# Altium PCB PAY_IFB_VER1.PcbDoc (part 1 of 4)
Units mil, origin at the board's own origin, x right, y up, seen from the top; angles counter-clockwise.
Board outline 6000 x 4000 mil, 2 copper layers (Top Layer, Bottom Layer); 413 components, 311 nets, 2101 pads, 9 vias.
Unrouted connection lines stored in the file: 1231.
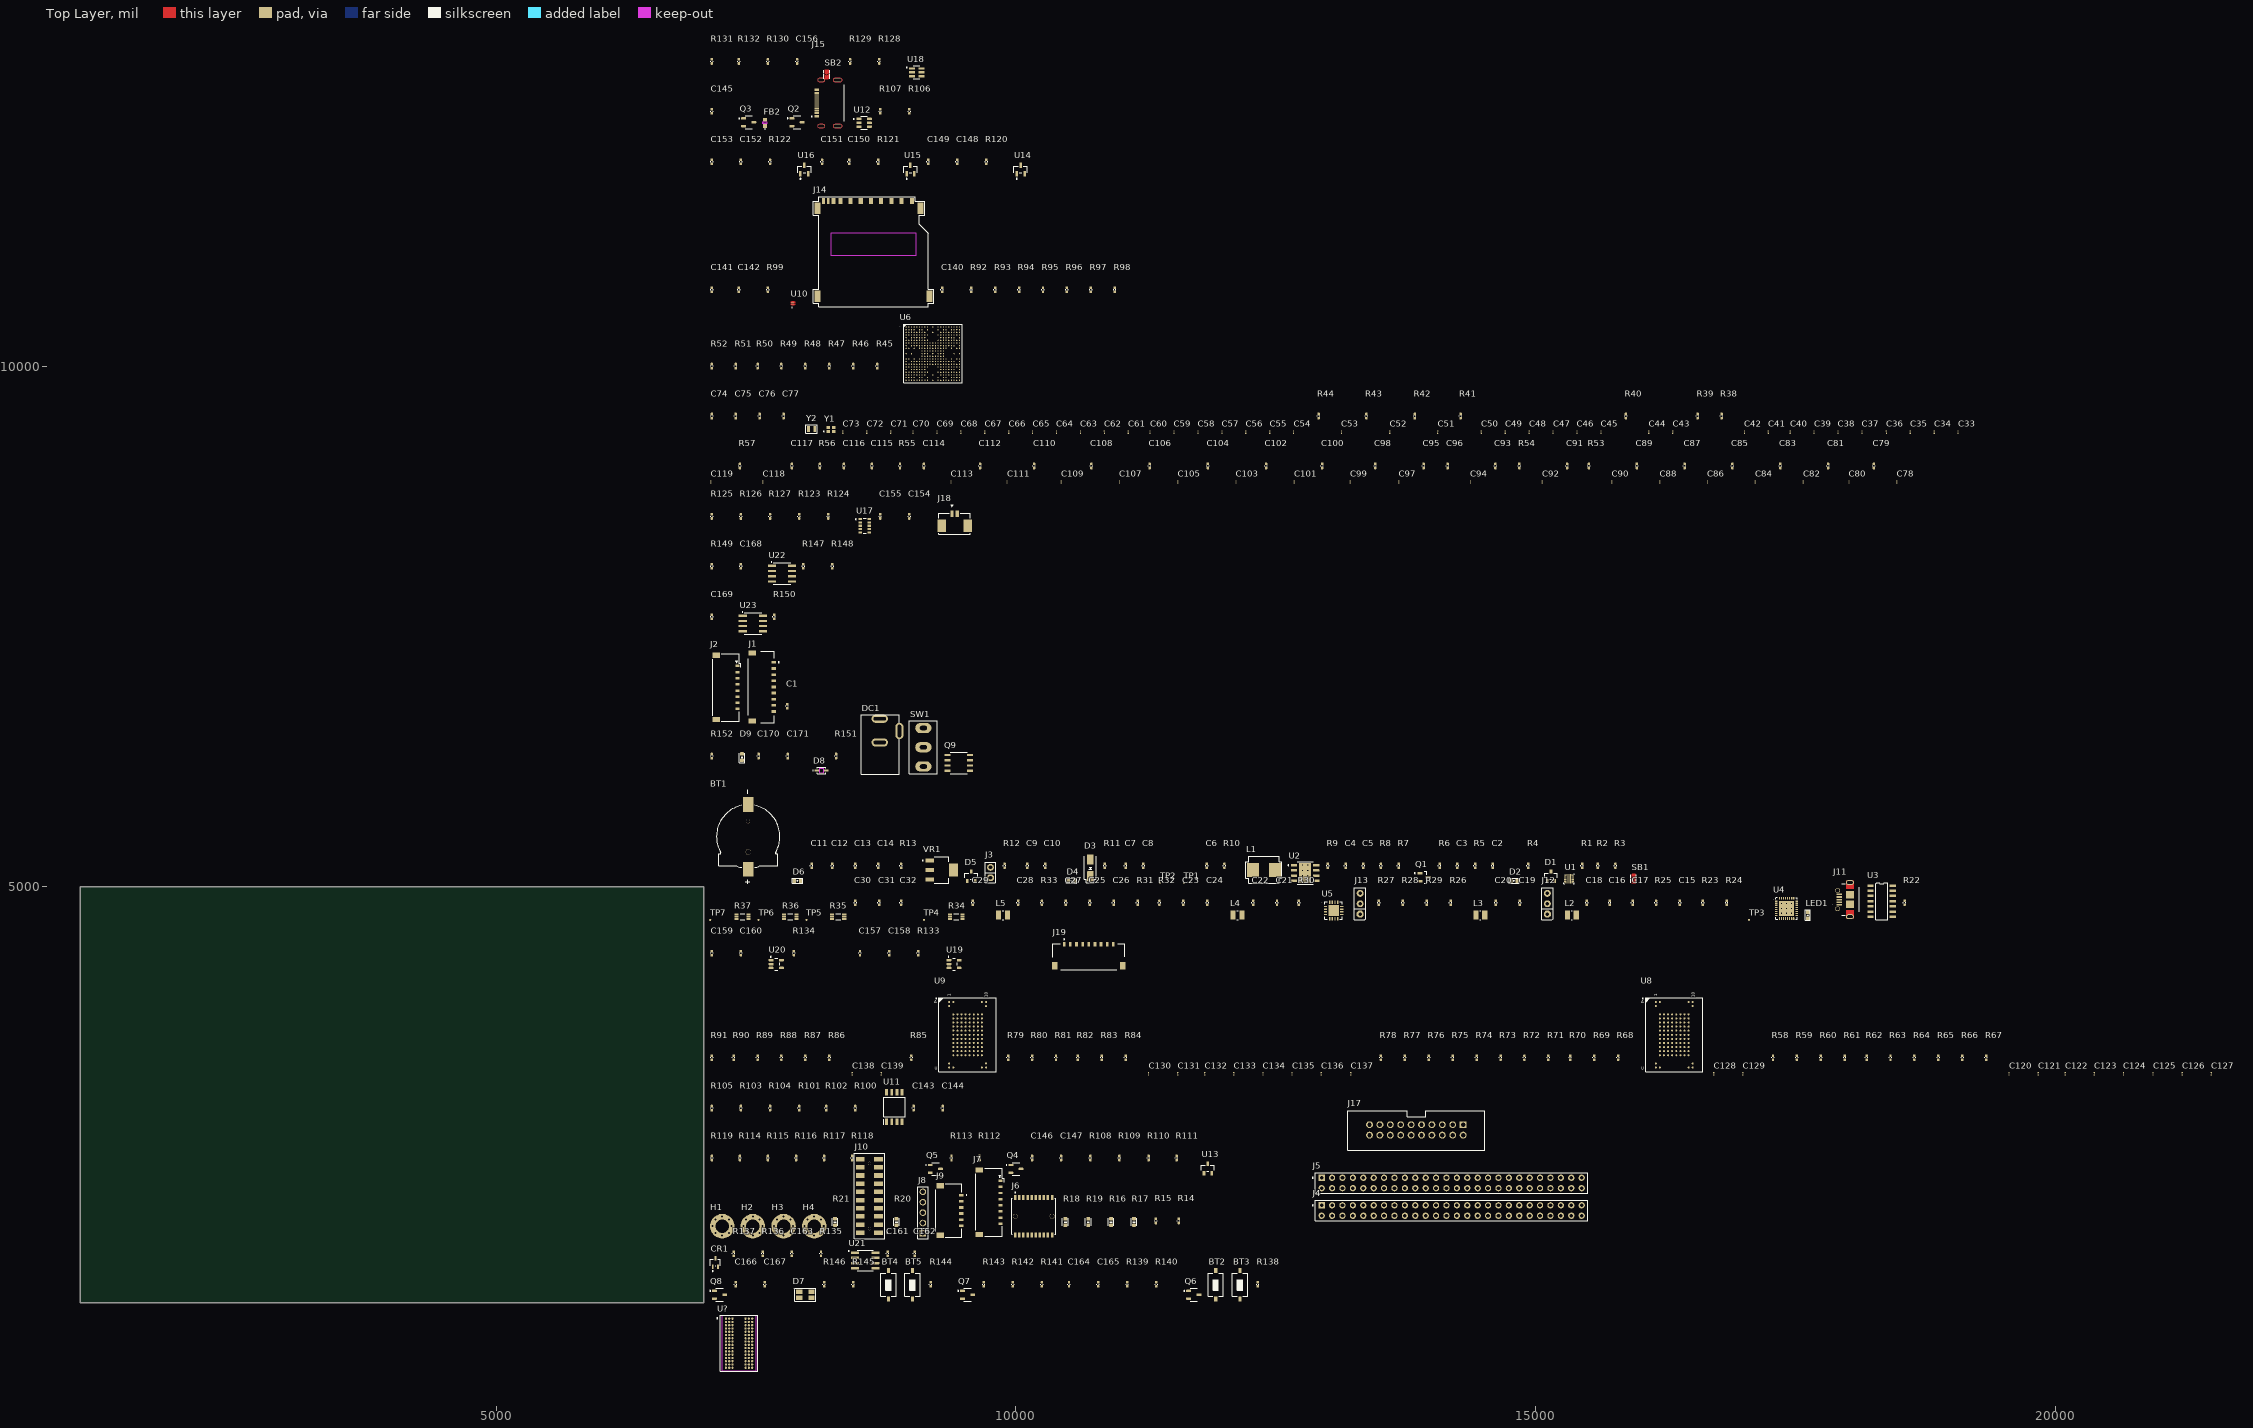
[diagram p0: Top Layer view]
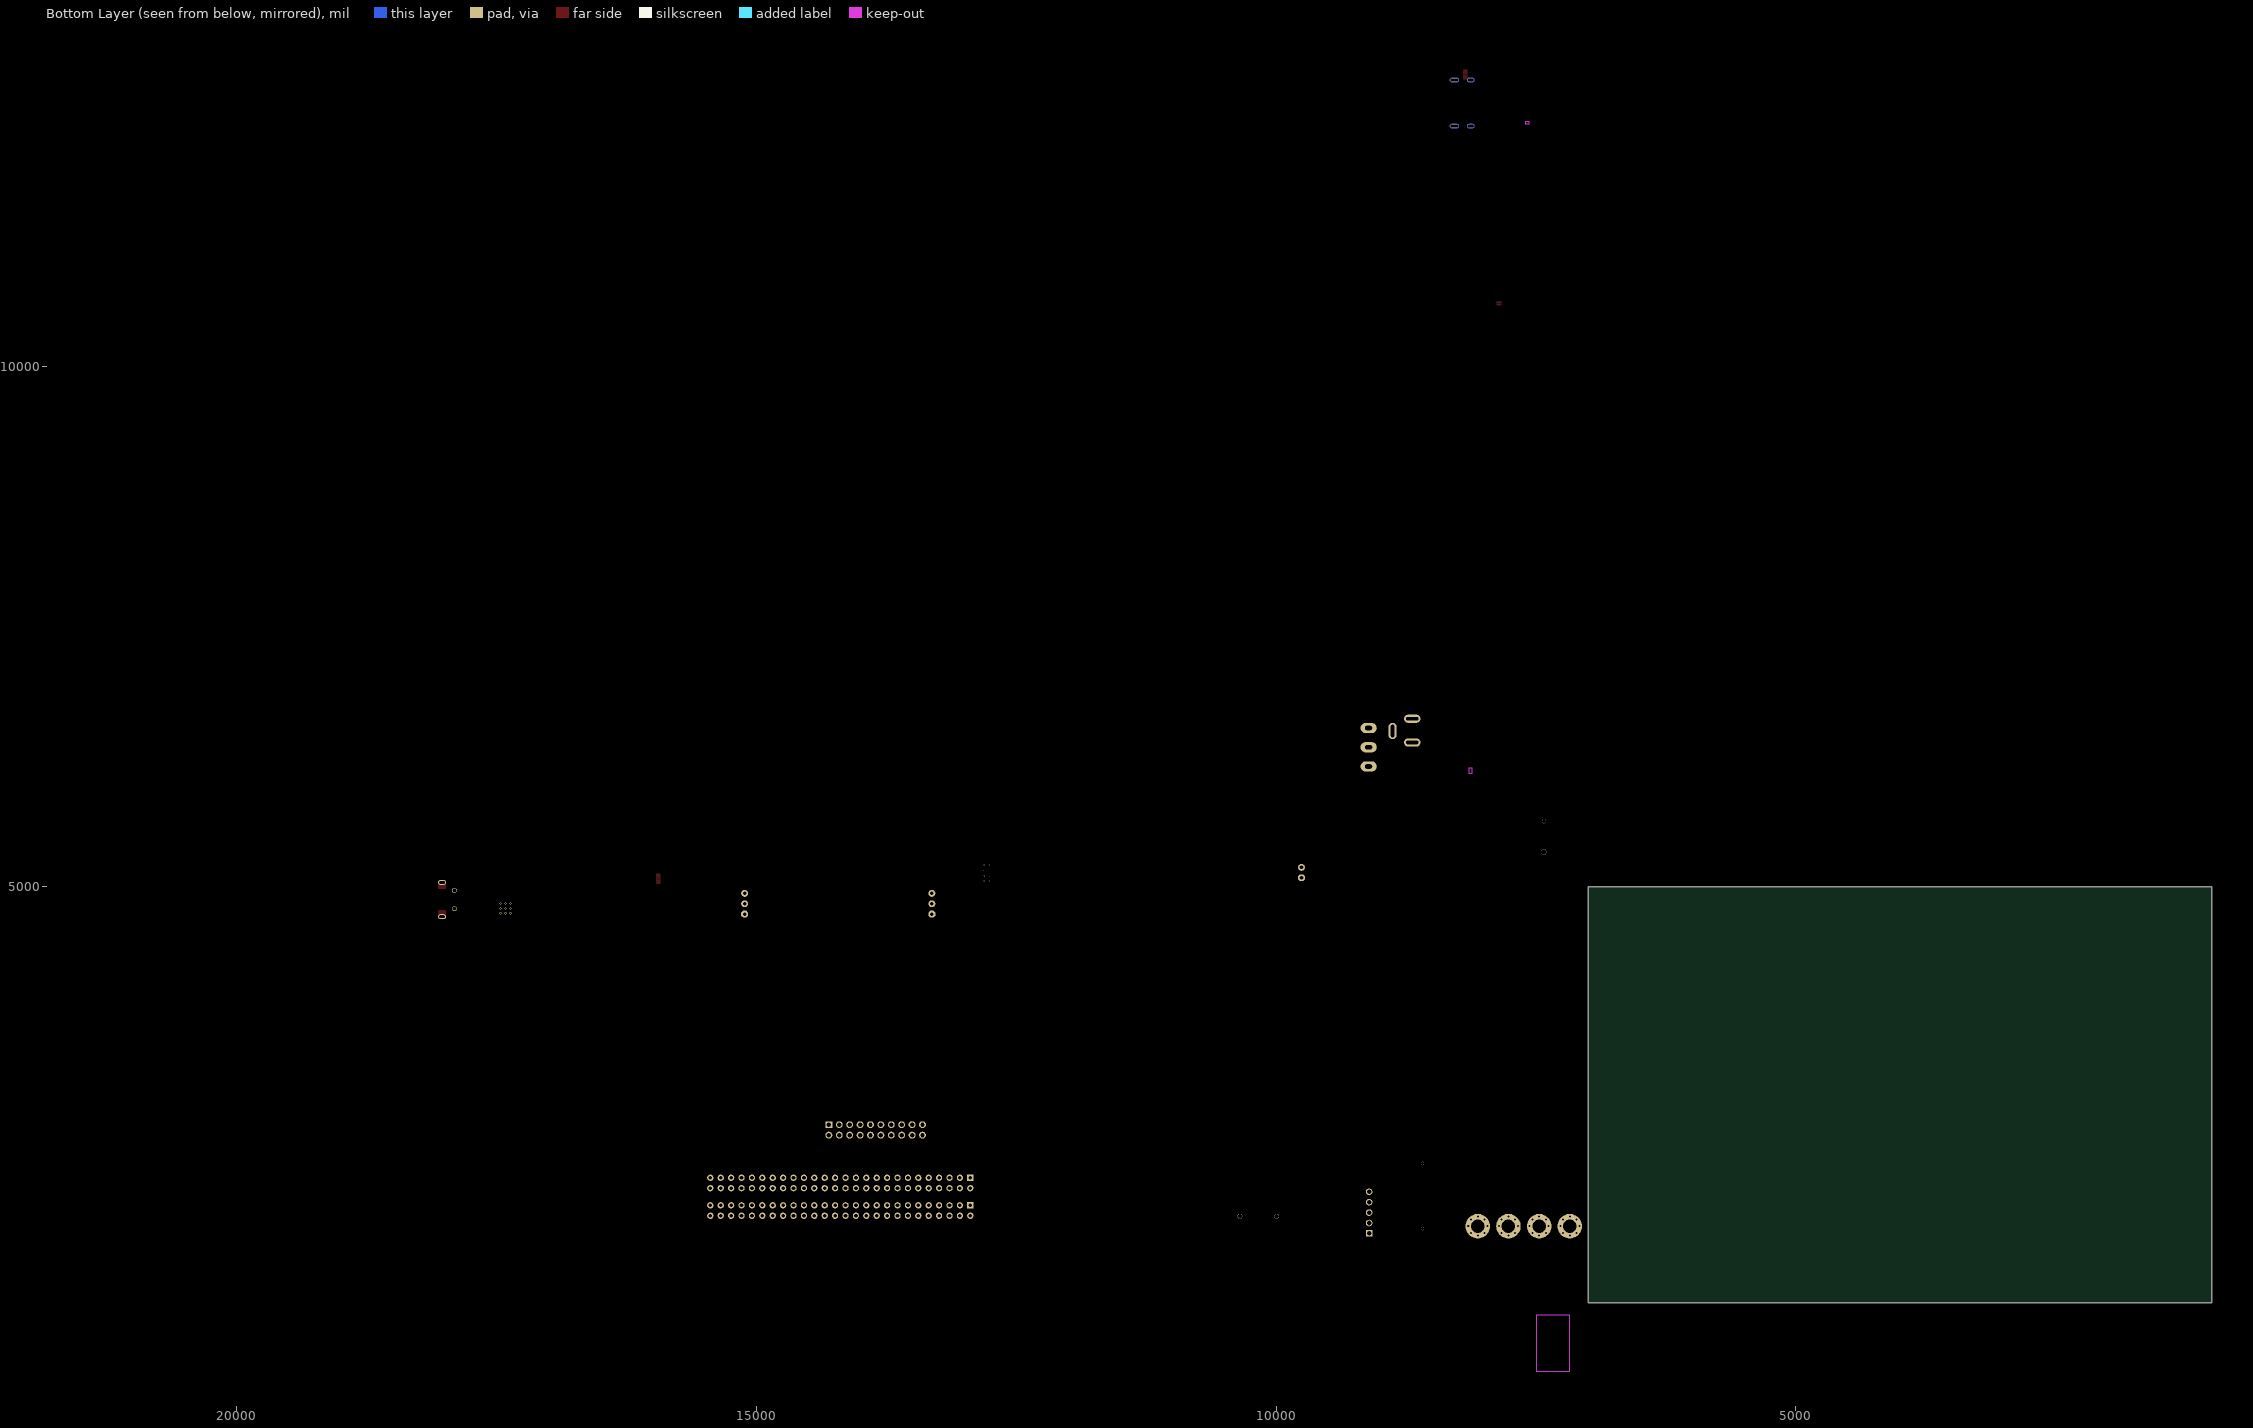
[diagram p1: Bottom Layer view, seen from below]

## Layer stack, top to bottom
Top Solder: solder mask 0.4, Solder Resist, Dk 3.5
Top Layer: signal copper 1.4
Dielectric 1: dielectric 12.6, FR-4, Dk 4.8
Bottom Layer: signal copper 1.4
Bottom Solder: solder mask 0.4, Solder Resist, Dk 3.5

## Board outline
1000,1000 7000,1000 7000,5000 1000,5000

## Design rules (kind name [scope] priority, off if disabled: settings)
Clearance [All] p1: gap=10 ignorepadtopadclearanceinfootprint=FALSE
DiffPairsRouting [All] p1: maxlimit=10 minlimit=10 mostfreqgap=10 toplayer_minwidth=15 toplayer_maxwidth=15 toplayer_prefwidth=15 bottomlayer_minwidth=15 bottomlayer_maxwidth=15 bottomlayer_prefwidth=15 maxuncoupledlength=500
MatchedLengths "Schematic Matched Net Lengths_5" [InNetClass('DDR-ADDR-CTL')] p1: tolerance=10 checknetsindiffpair=FALSE checkdiffpairvsdiffpair=TRUE checkxsignals=TRUE checkothers=TRUE
MatchedLengths "Schematic Matched Net Lengths_4" [InNetClass('DDR-LANE0')] p2: tolerance=10 checknetsindiffpair=FALSE checkdiffpairvsdiffpair=TRUE checkxsignals=TRUE checkothers=TRUE
MatchedLengths "Schematic Matched Net Lengths_3" [InNetClass('DDR-LANE1')] p3: tolerance=10 checknetsindiffpair=FALSE checkdiffpairvsdiffpair=TRUE checkxsignals=TRUE checkothers=TRUE
MatchedLengths "Schematic Matched Net Lengths_2" [InNetClass('DIFF100')] p4: tolerance=4 checknetsindiffpair=TRUE checkdiffpairvsdiffpair=FALSE checkxsignals=FALSE checkothers=FALSE
MatchedLengths "Schematic Matched Net Lengths_1" [InNetClass('DIFF90')] p5: tolerance=4 checknetsindiffpair=TRUE checkdiffpairvsdiffpair=FALSE checkxsignals=FALSE checkothers=FALSE
MatchedLengths "Schematic Matched Net Lengths" [InNetClass('JTAG')] p6: tolerance=78.74 checknetsindiffpair=FALSE checkdiffpairvsdiffpair=TRUE checkxsignals=TRUE checkothers=TRUE
PolygonConnect [All] p1: connectstyle=Relief reliefconductorwidth=10 reliefentries=4 polygonreliefangle="90 Angle" airgapwidth=10
RoutingVias [All] p1: holewidth=28 width=50 viastyle="Through Hole" minholewidth=28 minwidth=50 maxholewidth=28 maxwidth=50
SolderMaskExpansion [All] p1: expansion=4 istentingtop=FALSE
SupplyNets "Schematic Supply Nets_30" [InNet('STX_12V')] p1: voltage=0.000
SupplyNets "Schematic Supply Nets_29" [InNet('VLDO2')] p2: voltage=0.000
SupplyNets "Schematic Supply Nets_28" [InNet('DDR_VREF')] p3: voltage=0.000
SupplyNets "Schematic Supply Nets_27" [InNet('VBUS_FTDI')] p4: voltage=0.000
SupplyNets "Schematic Supply Nets_26" [InNet('VDDIODDR')] p5: voltage=0.000
SupplyNets "Schematic Supply Nets_25" [InNet('VLDO1')] p6: voltage=0.000
SupplyNets "Schematic Supply Nets_24" [InNet('BUS_3V3')] p7: voltage=0.000
SupplyNets "Schematic Supply Nets_23" [InNet('12V_IN')] p8: voltage=0.000
SupplyNets "Schematic Supply Nets_22" [InNet('VDD_3V3_FTDI')] p9: voltage=0.000
SupplyNets "Schematic Supply Nets_21" [InNet('GND')] p10: voltage=0.000
SupplyNets "Schematic Supply Nets_20" [InNet('12V_aux')] p11: voltage=0.000
SupplyNets "Schematic Supply Nets_19" [InNet('DCDC3')] p12: voltage=0.000
SupplyNets "Schematic Supply Nets_18" [InNet('DCDC1')] p13: voltage=0.000
SupplyNets "Schematic Supply Nets_17" [InNet('GND_USBA')] p14: voltage=0.000
SupplyNets "Schematic Supply Nets_16" [InNet('3V3_SDCARD')] p15: voltage=0.000
SupplyNets "Schematic Supply Nets_15" [InNet('VDDOUT25')] p16: voltage=0.000
SupplyNets "Schematic Supply Nets_14" [InNet('DCDC4')] p17: voltage=0.000
SupplyNets "Schematic Supply Nets_13" [InNet('12V_JACK')] p18: voltage=0.000
SupplyNets "Schematic Supply Nets_12" [InNet('3V3')] p19: voltage=0.000
SupplyNets "Schematic Supply Nets_11" [InNet('3V3_eMMC')] p20: voltage=0.000
SupplyNets "Schematic Supply Nets_10" [InNet('VDDCORE')] p21: voltage=0.000
SupplyNets "Schematic Supply Nets_9" [InNet('3.3_VBAT')] p22: voltage=0.000
SupplyNets "Schematic Supply Nets_8" [InNet('DCDC2')] p23: voltage=0.000
SupplyNets "Schematic Supply Nets_7" [InNet('VDDCPU')] p24: voltage=0.000
SupplyNets "Schematic Supply Nets_6" [InNet('VBAT')] p25: voltage=0.000
SupplyNets "Schematic Supply Nets_5" [InNet('BUS_5V')] p26: voltage=0.000
SupplyNets "Schematic Supply Nets_4" [InNet('USBA_VBUS_5V')] p27: voltage=0.000
SupplyNets "Schematic Supply Nets_3" [InNet('5V')] p28: voltage=0.000
SupplyNets "Schematic Supply Nets_2" [InNet('12V')] p29: voltage=0.000
SupplyNets "Schematic Supply Nets_1" [InNet('GOM_VBAT')] p30: voltage=0.000
SupplyNets "Schematic Supply Nets" [InNet('12V_EXP')] p31: voltage=0.000
Width [All] p1: maxlimit=10 minlimit=10 preferedwidth=10
29 further rules are at their usual default settings.

## Classes and differential pairs
differential pair class DIFF100: DDR_CK DDR_DQS0 DDR_DQS1
differential pair class DIFF90: CONN_USBA PAC_USB USBA
net class JTAG: NetJ17_3 NetJ17_5 NetJ17_7 NetJ17_9 NetJ17_13
net class DIFF100: DDR_CK_N DDR_CK_P DDR_DQS0_N DDR_DQS0_P DDR_DQS1_N DDR_DQS1_P
net class DIFF90: CONN_USBA_N CONN_USBA_P PAC_USB_N PAC_USB_P USBA_N USBA_P
net class DDR-LANE1: DDR_D8 DDR_D9 DDR_D10 DDR_D11 DDR_D12 DDR_D13 DDR_D14 DDR_D15 DDR_DQM1 DDR_DQS1_N DDR_DQS1_P
net class DDR-LANE0: DDR_D0 DDR_D1 DDR_D2 DDR_D3 DDR_D4 DDR_D5 DDR_D6 DDR_D7 DDR_DQM0 DDR_DQS0_N DDR_DQS0_P
net class DDR-ADDR-CTL: DDR_A0 DDR_A1 DDR_A2 DDR_A3 DDR_A4 DDR_A5 DDR_A6 DDR_A7 DDR_A8 DDR_A9 DDR_A10 DDR_A11 DDR_A12 DDR_A13 DDR_A14 DDR_A15 DDR_BA0 DDR_BA1 DDR_BA2 DDR_CAS DDR_CK_N DDR_CK_P DDR_CKE DDR_CS DDR_ODT DDR_RAS DDR_WE
component class WATCHDOG: C156 R128 R129 R130 R131 R132 SB2 U18
component class USB: C145 FB2 J15 Q2 Q3 R106 R107 U12
component class TEMP: C148 C149 C150 C151 C152 C153 R120 R121 R122 U14 U15 U16
component class SDCARD: C140 C141 C142 J14 R92 R93 R94 R95 R96 R97 R98 R99 U10
component class SAMA7D65_PIO: R45 R46 R47 R48 R49 R50 R51 R52 U6
component class SAMA7D65_MPU: C33 C34 C35 C36 C37 C38 C39 C40 C41 C42 C43 C44 C45 C46 C47 C48 C49 C50 C51 C52 C53 C54 C55 C56 C57 C58 C59 C60 C61 C62 C63 C64 C65 C66 C67 C68 C69 C70 C71 C72 C73 C74 C75 C76 C77 R38 R39 R40 R41 R42 R43 R44 Y1 Y2
component class SAMA7D65_DDR3L: C78 C79 C80 C81 C82 C83 C84 C85 C86 C87 C88 C89 C90 C91 C92 C93 C94 C95 C96 C97 C98 C99 C100 C101 C102 C103 C104 C105 C106 C107 C108 C109 C110 C111 C112 C113 C114 C115 C116 C117 C118 C119 R53 R54 R55 R56 R57 U7 U?
component class RTC: C154 C155 J18 R123 R124 R125 R126 R127 U17
component class RS485: C168 R147 R148 R149 U22
component class RS422: C169 R150 U23
component class Power: BT1 C2 C3 C4 C5 C6 C7 C8 C9 C10 C11 C12 C13 C14 D1 D2 D3 D4 D5 D6 J3 JP1 L1 Q1 R1 R2 R3 R4 R5 R6 R7 R8 R9 R10 R11 R12 R13 SB1 TP1 TP2 U1 U2 VR1
component class PowerConnector: C1 J1 J2
component class POWER_AUX: C170 C171 D8 D9 DC1 Q9 R151 R152 SW1
component class PMIC: C15 C16 C17 C18 C19 C20 C21 C22 C23 C24 C25 C26 C27 C28 C29 C30 C31 C32 FB1 J11 J12 J13 JP2 JP3 L2 L3 L4 L5 LED1 R22 R23 R24 R25 R26 R27 R28 R29 R30 R31 R32 R33 R34 R35 R36 R37 TP3 TP4 TP5 TP6 TP7 U3 U4 U5
component class LVDS: C157 C158 C159 C160 J19 R133 R134 U19 U20
component class eMMC: C120 C121 C122 C123 C124 C125 C126 C127 C128 C129 C130 C131 C132 C133 C134 C135 C136 C137 C138 C139 R58 R59 R60 R61 R62 R63 R64 R65 R66 R67 R68 R69 R70 R71 R72 R73 R74 R75 R76 R77 R78 R79 R80 R81 R82 R83 R84 R85 R86 R87 R88 R89 R90 R91 U8 U9
component class EEPROM: C143 C144 R100 R101 R102 R103 R104 R105 U11
component class DEBUG: C146 C147 J16 J17 Q4 Q5 R108 R109 R110 R111 R112 R113 R114 R115 R116 R117 R118 R119 U13
component class Conector: H1 H2 H3 H4 J4 J5 J6 J7 J8 J9 J10 R14 R15 R16 R17 R18 R19 R20 R21
component class CAN_PHY: C161 C162 C163 CR1 R135 R136 R137 U21
component class BUTTON_LED: BT2 BT3 BT4 BT5 C164 C165 C166 C167 D7 Q6 Q7 Q8 R138 R139 R140 R141 R142 R143 R144 R145 R146
differential pair USBA: +USBA_P -USBA_N
differential pair STX_RS485: +STX_RS485_P -STX_RS485_N
differential pair SENSE4: +SENSE4_P -SENSE4_N
differential pair SENSE3: +SENSE3_P -SENSE3_N
differential pair SENSE2: +SENSE2_P -SENSE2_N
differential pair SENSE1: +SENSE1_P -SENSE1_N
differential pair RS_422_TX: +RS_422_TX_P -RS_422_TX_N
differential pair RS_422_RX: +RS_422_RX_P -RS_422_RX_N
differential pair PAC_USB: +PAC_USB_P -PAC_USB_N
differential pair LVDS_TxD: +LVDS_TxD_P -LVDS_TxD_N
differential pair LVDS_TxC: +LVDS_TxC_P -LVDS_TxC_N
differential pair EXP_USB: +EXP_USB_P -EXP_USB_N
differential pair DDR_DQS1: +DDR_DQS1_P -DDR_DQS1_N
differential pair DDR_DQS0: +DDR_DQS0_P -DDR_DQS0_N
differential pair DDR_CK: +DDR_CK_P -DDR_CK_N
differential pair CONN_USBA: +CONN_USBA_P -CONN_USBA_N

## Components (designator, comment, footprint, x,y, rotation, side; value= is the part's Value field where it differs from the comment)
BT1 "1056" BAT_1056 7425,5490 r90 top
BT2 "BT_" SW2-SMD 11920,1170 r90 top value="SW chip 2 pin"
BT3 "BT_" SW2-SMD 12155,1170 r90 top value="SW chip 2 pin"
BT4 "BT_" SW2-SMD 8775,1170 r90 top value="SW chip 2 pin"
BT5 "BT_" SW2-SMD 9005,1170 r90 top value="SW chip 2 pin"
C1 "10uF/25V" CAP_C_1005X60 7800,6735 r90 top
C2 "10uF/25V" CAP_C_1005X60 14585,5200 r90 top
C3 "10uF/25V" CAP_C_1005X60 14245,5200 r90 top
C4 "2.2nF/25V" CAP_C_1005X60 13170,5200 r90 top
C5 "2.2nF/25V" CAP_C_1005X60 13340,5200 r90 top
C6 "0.1uF/16V" CAP_C_1005X60 11835,5200 r90 top
C7 "10uF/25V" CAP_C_1005X60 11055,5200 r90 top
C8 "1uF/25V" CAP_C_1005X60 11225,5200 r90 top
C9 "10uF/25V" CAP_C_1005X60 10110,5200 r90 top
C10 "10uF/25V" CAP_C_1005X60 10280,5200 r90 top
C11 "10uF/25V" CAP_C_1005X60 8035,5200 r90 top
C12 "10uF/25V" CAP_C_1005X60 8235,5200 r90 top
C13 "10uF/25V" CAP_C_1005X60 8455,5200 r90 top
C14 "10uF/25V" CAP_C_1005X60 8675,5200 r90 top
C15 "4.7uF/10V" CAP_C_1005X60 16385,4845 r90 top
C16 "0.1uF/16V" CAP_C_1005X60 15710,4845 r90 top
C17 "0.1uF/16V" CAP_C_1005X60 15930,4845 r90 top
C18 "22uF/10V" CAP_C_1005X60 15490,4845 r90 top
C19 "4.7uF/10V" CAP_C_1005X60 14845,4845 r90 top
C20 "22uF/10V" CAP_C_1005X60 14615,4845 r90 top
C21 "4.7uF/10V" CAP_C_1005X60 12510,4845 r90 top
C22 "22uF/10V" CAP_C_1005X60 12280,4845 r90 top
C23 "0.1uF/16V" CAP_C_1005X60 11610,4845 r90 top
C24 "4.7uF/10V" CAP_C_1005X60 11840,4845 r90 top
C25 "0.1uF/16V" CAP_C_1005X60 10710,4845 r90 top
C26 "4.7uF/10V" CAP_C_1005X60 10940,4845 r90 top
C27 "4.7uF/10V" CAP_C_1005X60 10480,4845 r90 top
C28 "22uF/10V" CAP_C_1005X60 10020,4845 r90 top
C29 "4.7uF/10V" CAP_C_1005X60 9585,4845 r90 top
C30 "4.7uF/10V" CAP_C_1005X60 8455,4845 r90 top
C31 "4.7uF/10V" CAP_C_1005X60 8685,4845 r90 top
C32 "4.7uF/10V" CAP_C_1005X60 8895,4845 r90 top
C33 "4.7uF/10V" CAP_C_0603x30 19060,9370 r90 top
C34 "0.1uF/16V" CAP_C_0603x30 18830,9370 r90 top
C35 "0.1uF/16V" CAP_C_0603x30 18600,9370 r90 top
C36 "0.1uF/16V" CAP_C_0603x30 18370,9370 r90 top
C37 "0.1uF/16V" CAP_C_0603x30 18135,9370 r90 top
C38 "0.1uF/16V" CAP_C_0603x30 17905,9370 r90 top
C39 "4.7uF/10V" CAP_C_0603x30 17675,9370 r90 top
C40 "0.1uF/16V" CAP_C_0603x30 17445,9370 r90 top
C41 "0.1uF/16V" CAP_C_0603x30 17235,9370 r90 top
C42 "0.1uF/16V" CAP_C_0603x30 17005,9370 r90 top
C43 "0.1uF/16V" CAP_C_0603x30 16315,9370 r90 top
C44 "0.1uF/16V" CAP_C_0603x30 16085,9370 r90 top
C45 "0.1uF/16V" CAP_C_0603x30 15625,9370 r90 top
C46 "0.1uF/16V" CAP_C_0603x30 15395,9370 r90 top
C47 "0.1uF/16V" CAP_C_0603x30 15165,9370 r90 top
C48 "0.1uF/16V" CAP_C_0603x30 14935,9370 r90 top
C49 "0.1uF/16V" CAP_C_0603x30 14705,9370 r90 top
C50 "0.1uF/16V" CAP_C_0603x30 14475,9370 r90 top
C51 "0.1uF/16V" CAP_C_0603x30 14055,9370 r90 top
C52 "0.1uF/16V" CAP_C_0603x30 13595,9370 r90 top
C53 "0.1uF/16V" CAP_C_0603x30 13130,9370 r90 top
C54 "4.7uF/10V" CAP_C_0603x30 12670,9370 r90 top
C55 "0.1uF/16V" CAP_C_0603x30 12440,9370 r90 top
C56 "0.1uF/16V" CAP_C_0603x30 12210,9370 r90 top
C57 "0.1uF/16V" CAP_C_0603x30 11980,9370 r90 top
C58 "0.1uF/16V" CAP_C_0603x30 11750,9370 r90 top
C59 "0.1uF/16V" CAP_C_0603x30 11520,9370 r90 top
C60 "0.1uF/16V" CAP_C_0603x30 11290,9370 r90 top
C61 "0.1uF/16V" CAP_C_0603x30 11080,9370 r90 top
C62 "0.1uF/16V" CAP_C_0603x30 10850,9370 r90 top
C63 "0.1uF/16V" CAP_C_0603x30 10620,9370 r90 top
C64 "4.7uF/10V" CAP_C_0603x30 10390,9370 r90 top
C65 "0.1uF/16V" CAP_C_0603x30 10160,9370 r90 top
C66 "2.2uF/10V" CAP_C_0603x30 9930,9370 r90 top
C67 "0.1uF/16V" CAP_C_0603x30 9700,9370 r90 top
C68 "0.1uF/16V" CAP_C_0603x30 9470,9370 r90 top
C69 "0.1uF/16V" CAP_C_0603x30 9240,9370 r90 top
C70 "0.1uF/16V" CAP_C_0603x30 9010,9370 r90 top
C71 "0.1uF/16V" CAP_C_0603x30 8795,9370 r90 top
C72 "0.1uF/16V" CAP_C_0603x30 8565,9370 r90 top
C73 "0.1uF/16V" CAP_C_0603x30 8335,9370 r90 top
C74 "18pF/50V" CAP_C_1005X60 7075,9525 r90 top
C75 "18pF/50V" CAP_C_1005X60 7305,9525 r90 top
C76 "20pF/50V" CAP_C_1005X60 7535,9525 r90 top
C77 "20pF/50V" CAP_C_1005X60 7765,9525 r90 top
C78 "4.7uF/10V" CAP_C_0603x30 18470,8890 r90 top
C79 "0.1uF/16V" CAP_C_1005X60 18250,9045 r90 top
C80 "0.1uF/16V" CAP_C_0603x30 18010,8890 r90 top
C81 "0.1uF/16V" CAP_C_1005X60 17810,9045 r90 top
C82 "0.1uF/16V" CAP_C_0603x30 17570,8890 r90 top
C83 "0.1uF/16V" CAP_C_1005X60 17350,9045 r90 top
C84 "0.1uF/16V" CAP_C_0603x30 17110,8890 r90 top
C85 "0.1uF/16V" CAP_C_1005X60 16890,9045 r90 top
C86 "0.1uF/16V" CAP_C_0603x30 16650,8890 r90 top
C87 "0.1uF/16V" CAP_C_1005X60 16430,9045 r90 top
C88 "0.1uF/16V" CAP_C_0603x30 16190,8890 r90 top
C89 "0.1uF/16V" CAP_C_1005X60 15970,9045 r90 top
C90 "0.1uF/16V" CAP_C_0603x30 15730,8890 r90 top
C91 "0.1uF/16V" CAP_C_1005X60 15300,9045 r90 top
C92 "0.1uF/16V" CAP_C_0603x30 15060,8890 r90 top
C93 "0.1uF/16V" CAP_C_1005X60 14610,9045 r90 top
C94 "0.1uF/16V" CAP_C_0603x30 14370,8890 r90 top
C95 "0.1uF/16V" CAP_C_1005X60 13920,9045 r90 top
C96 "0.1uF/16V" CAP_C_1005X60 14150,9045 r90 top
C97 "0.1uF/16V" CAP_C_0603x30 13680,8890 r90 top
C98 "4.7uF/10V" CAP_C_1005X60 13455,9045 r90 top
C99 "4.7uF/10V" CAP_C_0603x30 13215,8890 r90 top
C100 "0.1uF/16V" CAP_C_1005X60 12945,9045 r90 top
C101 "0.1uF/16V" CAP_C_0603x30 12675,8890 r90 top
C102 "0.1uF/16V" CAP_C_1005X60 12405,9045 r90 top
C103 "0.1uF/16V" CAP_C_0603x30 12115,8890 r90 top
C104 "0.1uF/16V" CAP_C_1005X60 11845,9045 r90 top
C105 "0.1uF/16V" CAP_C_0603x30 11555,8890 r90 top
C106 "0.1uF/16V" CAP_C_1005X60 11285,9045 r90 top
C107 "0.1uF/16V" CAP_C_0603x30 10995,8890 r90 top
C108 "0.1uF/16V" CAP_C_1005X60 10725,9045 r90 top
C109 "0.1uF/16V" CAP_C_0603x30 10435,8890 r90 top
C110 "0.1uF/16V" CAP_C_1005X60 10175,9045 r90 top
C111 "0.1uF/16V" CAP_C_0603x30 9915,8890 r90 top
C112 "0.1uF/16V" CAP_C_1005X60 9655,9045 r90 top
C113 "0.1uF/16V" CAP_C_0603x30 9375,8890 r90 top
C114 "4.7uF/10V" CAP_C_1005X60 9115,9045 r90 top
C115 "0.1uF/16V" CAP_C_1005X60 8615,9045 r90 top
C116 "4.7uF/10V" CAP_C_1005X60 8345,9045 r90 top
C117 "0.1uF/16V" CAP_C_1005X60 7845,9045 r90 top
C118 "0.1uF/16V" CAP_C_0603x30 7565,8890 r90 top
C119 "0.1uF/16V" CAP_C_0603x30 7065,8890 r90 top
C120 "0.1uF/16V" CAP_C_0603x30 19550,3200 r90 top
C121 "0.1uF/16V" CAP_C_0603x30 19830,3200 r90 top
C122 "0.1uF/16V" CAP_C_0603x30 20090,3200 r90 top
C123 "0.1uF/16V" CAP_C_0603x30 20370,3200 r90 top
C124 "0.1uF/16V" CAP_C_0603x30 20650,3200 r90 top
C125 "0.1uF/16V" CAP_C_0603x30 20935,3200 r90 top
C126 "0.1uF/16V" CAP_C_0603x30 21215,3200 r90 top
C127 "0.1uF/16V" CAP_C_0603x30 21495,3200 r90 top
C128 "2.2uF/10V" CAP_C_0603x30 16710,3200 r90 top
C129 "0.1uF/16V" CAP_C_0603x30 16990,3200 r90 top
C130 "0.1uF/16V" CAP_C_0603x30 11275,3200 r90 top
C131 "0.1uF/16V" CAP_C_0603x30 11555,3200 r90 top
C132 "0.1uF/16V" CAP_C_0603x30 11815,3200 r90 top
C133 "0.1uF/16V" CAP_C_0603x30 12095,3200 r90 top
C134 "0.1uF/16V" CAP_C_0603x30 12375,3200 r90 top
C135 "0.1uF/16V" CAP_C_0603x30 12655,3200 r90 top
C136 "0.1uF/16V" CAP_C_0603x30 12935,3200 r90 top
C137 "0.1uF/16V" CAP_C_0603x30 13220,3200 r90 top
C138 "2.2uF/10V" CAP_C_0603x30 8425,3200 r90 top
C139 "0.1uF/16V" CAP_C_0603x30 8705,3200 r90 top
C140 "0.1uF/16V" CAP_C_1005X60 9290,10740 r90 top
C141 "0.1uF/16V" CAP_C_1005X60 7075,10740 r90 top
C142 "0.1uF/16V" CAP_C_1005X60 7335,10740 r90 top
C143 "0.1uF/16V" CAP_C_1005X60 9015,2870 r90 top
C144 "0.1uF/16V" CAP_C_1005X60 9295,2870 r90 top
C145 "100nF" CAP_C_1005X60 7075,12455 r90 top
C146 "1uF/16V" CAP_C_1005X60 10155,2390 r90 top
C147 "1uF/16V" CAP_C_1005X60 10435,2390 r90 top
C148 "1uF/16V" CAP_C_1005X60 9435,11970 r90 top
C149 "1uF/16V" CAP_C_1005X60 9155,11970 r90 top
C150 "1uF/16V" CAP_C_1005X60 8395,11970 r90 top
C151 "1uF/16V" CAP_C_1005X60 8135,11970 r90 top
C152 "1uF/16V" CAP_C_1005X60 7355,11970 r90 top
C153 "1uF/16V" CAP_C_1005X60 7075,11970 r90 top
C154 "0.1uF/16V" CAP_C_1005X60 8975,8560 r90 top
C155 "0.1uF/16V" CAP_C_1005X60 8695,8560 r90 top
C156 "1uF/16V" CAP_C_1005X60 7895,12935 r90 top
C157 "10uF/25V" CAP_C_1005X60 8500,4360 r90 top
C158 "1uF/16V" CAP_C_1005X60 8780,4360 r90 top
C159 "10uF/25V" CAP_C_1005X60 7075,4360 r90 top
C160 "1uF/16V" CAP_C_1005X60 7355,4360 r90 top
C161 "1uF/25V" CAP_C_1005X60 8765,1470 r90 top
C162 "1uF/16V" CAP_C_1005X60 9025,1470 r90 top
C163 "47nF/16V" CAP_C_1005X60 7845,1470 r90 top
C164 "2.2uF/16V" CAP_C_1005X60 10510,1175 r90 top
C165 "2.2uF/16V" CAP_C_1005X60 10790,1175 r90 top
C166 "2.2uF/16V" CAP_C_1005X60 7305,1175 r90 top
C167 "2.2uF/16V" CAP_C_1005X60 7585,1175 r90 top
C168 "0.1uF/16V" CAP_C_1005X60 7355,8080 r90 top
C169 "0.1uF/16V" CAP_C_1005X60 7075,7595 r90 top
C170 "10uF/25V" CAP_C_1005X60 7525,6255 r90 top
C171 "10uF/25V" CAP_C_1005X60 7805,6255 r90 top
CR1 "ESDCAN02-2BWY" SOT323-3L_STM 7110,1385 r0 top
D1 "Diode Schottky Dual CK" SOT-23-3 15145,5100 r0 top value=BAT54C-G
D2 "150060RS75000" LED-0603-RED 14790,5055 r0 top
D3 "SS54" DO-214AC_SMA 10715,5180 r90 top value=SS34
D4 "150060YS75000" LED-0603-YELLOW 10535,5055 r0 top
D5 "Diode Schottky Dual CK" SOT-23-3 9570,5100 r0 top value=BAT54C-G
D6 "150060GS75000" LED-0603-GREEN 7900,5055 r0 top
D7 "LED_RGB_CLV1A" PLCC-4_CLV1A-FKB 7975,1075 r0 top value="RED, GREEN, BLUE"
D8 "SZMM3Z15VT1GX" ZDO_SOD223-SC-76_NEX 8130,6115 r0 top
D9 "150060RS75000" LED_0603 7365,6245 r90 top
DC1 "Jack DC" DC0 8690,6500 r90 top value="Jac DC"
FB2 "BLM18PG121SN1D" IND_BLM18_0603_MUR 7585,12345 r90 top
H1 "hole_space" HOLE_SPACE 7175,1735 r0 top
H2 "hole_space" HOLE_SPACE 7470,1735 r0 top
H3 "hole_space" HOLE_SPACE 7765,1735 r0 top
H4 "hole_space" HOLE_SPACE 8060,1735 r0 top
J1 "5040500991" 5040500991 7550,6920 r90 top
J2 "5040500891" MOLEX_5040500891 7210,6915 r90 top
J3 "Header 1x2" HDR_M_2.54_1x2 9755,5135 r90 top value="HDR-2.54 Male 1x2"
J4 "ESQ-126-14-G-D" ESQ-126-14-G-D 14190,1885 r180 top
J5 "ESQ-126-14-G-D" ESQ-126-14-G-D 14190,2150 r180 top
J6 "FSI-110-03-X-D-AD-TR" SAMTEC_FSI-110-03-X-D-AD-TR 10170,1830 r0 top
J7 "5040500891" MOLEX_5040500891 9740,1965 r90 top
J8 "HEADER 5x1" Header_254P_5x1 9105,1865 r90 top
J9 "5040500691" 5040500691 9355,1885 r90 top
J10 "SAMTEC-TLE-110-01-X-DV-A" SAMTEC-TLE-110-01-X-DV-A 8590,2025 r90 top
J11 "CON USB2.0 Mini_Micro" CON_USB_Micro-AB_SMD_RA_MOLEX_0475890001 18025,4875 r90 top value=0475890001
J12 "Header 1x3" HDR_M_2.54_1x3 15110,4835 r90 top value="1x3 header"
J13 "Header 1x3" HDR_M_2.54_1x3 13310,4835 r90 top value="1x3 header"
J14 "SD-114-00841-68" CON_SD_GSD090012SEU 8630,11070 r0 top value="SD Card 11P Receptacle"
J15 "USB4520-03-0-A_REVA" GCT_USB4520-03-0-A_REVA 8285,12535 r90 top
J17 "Header 2x10" HDR_M_2.54_2X10_SBH11-PBPC-D10-ST-BK 13850,2660 r180 top value="2x10 2.54mm shrouded"
J18 "Header 2x1_2M" molex_0532610271 9410,8490 r0 top
J19 "5040500991" 5040500991 10700,4325 r180 top
L1 "SRP7050TA-220M" SRP7050TA-220M 12385,5160 r0 top
L2 "1.5uH 3.5A" INDC2520X120N 15345,4725 r0 top
L3 "1.5uH 3.5A" INDC2520X120N 14465,4725 r0 top
L4 "1.5uH 3.5A" INDC2520X120N 12130,4725 r0 top
L5 "1.5uH 3.5A" INDC2520X120N 9875,4725 r0 top
LED1 "LED" LED-0603-RED 17615,4725 r90 top value="LED 3 - 5 ly 2 Colour"
Q1 "MMBT2222A" SOT95P240X120-3N 13925,5090 r0 top
Q2 "AO3400A" SOT95P280X125-3N 7895,12350 r0 top
Q3 "AO3400A" SOT95P280X125-3N 7430,12350 r0 top
Q4 "AO3400A" SOT95P280X125-3N 10000,2285 r0 top
Q5 "AO3400A" SOT95P280X125-3N 9225,2285 r0 top
Q6 "AO3400A" SOT95P280X125-3N 11710,1075 r0 top
Q7 "AO3400A" SOT95P280X125-3N 9535,1075 r0 top
Q8 "AO3400A" SOT95P280X125-3N 7150,1075 r0 top
Q9 "Transistor MOS-P SSSGDDDD" SO8SOP-8L_AOS 9450,6190 r0 top value=AOSP2132130V
R1 "10k" RES_C_1005X40 15445,5200 r90 top
R2 "10k" RES_C_1005X40 15595,5200 r90 top
R3 "4.7k" RES_C_1005X40 15765,5200 r90 top
R4 "470k" RES_C_1005X40 14925,5200 r90 top
R5 "11k" RES_C_1005X40 14415,5200 r90 top
R6 "1k" RES_C_1005X40 14075,5200 r90 top
R7 "47k" RES_C_1005X40 13680,5200 r90 top
R8 "10k" RES_C_1005X40 13510,5200 r90 top
R9 "1k" RES_C_1005X40 13000,5200 r90 top
R10 "1k" RES_C_1005X40 12005,5200 r90 top
R11 "10k" RES_C_1005X40 10855,5200 r90 top
R12 "3.24k" RES_C_1005X40 9890,5200 r90 top
R13 "1k" RES_C_1005X40 8895,5200 r90 top
R14 "22R" RES_C_1005X40 11565,1785 r90 top
R15 "22R" RES_C_1005X40 11345,1785 r90 top
R16 "0R" RES_C_1608X60 10915,1775 r90 top
R17 "0R" RES_C_1608X60 11135,1775 r90 top
R18 "0R" RES_C_1608X60 10475,1775 r90 top
R19 "0R" RES_C_1608X60 10695,1775 r90 top
R20 "0R" RES_C_1608X60 8850,1775 r90 top
R21 "0R" RES_C_1608X60 8260,1775 r90 top
R22 "1k 1%" RES_C_1005X40 18545,4845 r90 top
R23 "1k 1%" RES_C_1005X40 16605,4845 r90 top
R24 "10k 1%" RES_C_1005X40 16835,4845 r90 top
R25 "1k 1%" RES_C_1005X40 16155,4845 r90 top
R26 "2.2k 1%" RES_C_1005X40 14180,4845 r90 top
R27 "100k 1%" RES_C_1005X40 13490,4845 r90 top
R28 "10k 1%" RES_C_1005X40 13720,4845 r90 top
R29 "10k 1%" RES_C_1005X40 13950,4845 r90 top
R30 "2.2k 1%" RES_C_1005X40 12720,4845 r90 top
R31 "10k 1%" RES_C_1005X40 11170,4845 r90 top
R32 "10k 1%" RES_C_1005X40 11380,4845 r90 top
R33 "0R" RES_C_1005X40 10250,4845 r90 top
R34 "Shunt 4 Pin" RES_C_1206_SHUNT 9425,4710 r0 top value=0.047R
R35 "Shunt 4 Pin" RES_C_1206_SHUNT 8290,4710 r0 top value=0.047R
R36 "Shunt 4 Pin" RES_C_1206_SHUNT 7830,4710 r0 top value=0.047R
R37 "Shunt 4 Pin" RES_C_1206_SHUNT 7370,4710 r0 top value=0.047R
R38 "5.62k" RES_C_1005X40 16785,9525 r90 top
R39 "10k 1%" RES_C_1005X40 16555,9525 r90 top
R40 "1k 1%" RES_C_1005X40 15865,9525 r90 top
R41 "16.9k 1%" RES_C_1005X40 14275,9525 r90 top
R42 "16.9k 1%" RES_C_1005X40 13835,9525 r90 top
R43 "20k 1%" RES_C_1005X40 13370,9525 r90 top
R44 "16.9k 1%" RES_C_1005X40 12910,9525 r90 top
R45 "2.2k 1%" RES_C_1005X40 8665,10005 r90 top
R46 "2.2k 1%" RES_C_1005X40 8435,10005 r90 top
R47 "2.2k 1%" RES_C_1005X40 8205,10005 r90 top
R48 "22R 1%" RES_C_1005X40 7975,10005 r90 top
R49 "22R 1%" RES_C_1005X40 7745,10005 r90 top
R50 "2.2k 1%" RES_C_1005X40 7515,10005 r90 top
R51 "22R 1%" RES_C_1005X40 7305,10005 r90 top
R52 "22R 1%" RES_C_1005X40 7075,10005 r90 top
R53 "100k" RES_C_1005X40 15510,9045 r90 top
R54 "240R 1%" RES_C_1005X40 14840,9045 r90 top
R55 "1k 1%" RES_C_1005X40 8885,9045 r90 top
R56 "1k 1%" RES_C_1005X40 8115,9045 r90 top
R57 "240R 1%" RES_C_1005X40 7345,9045 r90 top
R58 "10k" RES_C_1005X40 17280,3355 r90 top
R59 "10k" RES_C_1005X40 17510,3355 r90 top
R60 "10k" RES_C_1005X40 17740,3355 r90 top
R61 "10k" RES_C_1005X40 17970,3355 r90 top
R62 "10k" RES_C_1005X40 18180,3355 r90 top
R63 "10k" RES_C_1005X40 18410,3355 r90 top
R64 "10k" RES_C_1005X40 18640,3355 r90 top
R65 "10k" RES_C_1005X40 18870,3355 r90 top
R66 "10k" RES_C_1005X40 19100,3355 r90 top
R67 "10k" RES_C_1005X40 19330,3355 r90 top
R68 "22R" RES_C_1005X40 15790,3355 r90 top
R69 "22R" RES_C_1005X40 15560,3355 r90 top
R70 "22R" RES_C_1005X40 15330,3355 r90 top
R71 "22R" RES_C_1005X40 15120,3355 r90 top
R72 "22R" RES_C_1005X40 14890,3355 r90 top
R73 "22R" RES_C_1005X40 14660,3355 r90 top
R74 "22R" RES_C_1005X40 14430,3355 r90 top
R75 "22R" RES_C_1005X40 14200,3355 r90 top
R76 "22R" RES_C_1005X40 13970,3355 r90 top
R77 "22R" RES_C_1005X40 13740,3355 r90 top
R78 "47k" RES_C_1005X40 13510,3355 r90 top
R79 "10k" RES_C_1005X40 9925,3355 r90 top
R80 "10k" RES_C_1005X40 10155,3355 r90 top
R81 "10k" RES_C_1005X40 10385,3355 r90 top
R82 "10k" RES_C_1005X40 10595,3355 r90 top
R83 "10k" RES_C_1005X40 10825,3355 r90 top
R84 "10k" RES_C_1005X40 11055,3355 r90 top
R85 "22R" RES_C_1005X40 8995,3355 r90 top
R86 "22R" RES_C_1005X40 8205,3355 r90 top
R87 "22R" RES_C_1005X40 7975,3355 r90 top
R88 "22R" RES_C_1005X40 7745,3355 r90 top
R89 "22R" RES_C_1005X40 7515,3355 r90 top
R90 "22R" RES_C_1005X40 7285,3355 r90 top
R91 "47k" RES_C_1005X40 7075,3355 r90 top
R92 "47k 1%" RES_C_1005X40 9570,10740 r90 top
R93 "47k 1%" RES_C_1005X40 9800,10740 r90 top
R94 "47k 1%" RES_C_1005X40 10030,10740 r90 top
R95 "47k 1%" RES_C_1005X40 10260,10740 r90 top
R96 "47k 1%" RES_C_1005X40 10490,10740 r90 top
R97 "10k 1%" RES_C_1005X40 10720,10740 r90 top
R98 "10k 1%" RES_C_1005X40 10950,10740 r90 top
R99 "10k 1%" RES_C_1005X40 7615,10740 r90 top
R100 "22R" RES_C_1005X40 8455,2870 r90 top
R101 "22R" RES_C_1005X40 7915,2870 r90 top
R102 "22R" RES_C_1005X40 8175,2870 r90 top
R103 "22R" RES_C_1005X40 7355,2870 r90 top
R104 "22R" RES_C_1005X40 7635,2870 r90 top
R105 "22R" RES_C_1005X40 7075,2870 r90 top
R106 "10k" RES_C_1005X40 8975,12455 r90 top
R107 "20k" RES_C_1005X40 8695,12455 r90 top
R108 "3.3k 1%" RES_C_1005X40 10715,2390 r90 top
R109 "3.3k 1%" RES_C_1005X40 10995,2390 r90 top
R110 "3.3k 1%" RES_C_1005X40 11275,2390 r90 top
R111 "3.3k 1%" RES_C_1005X40 11545,2390 r90 top
R112 "22R 1%" RES_C_1005X40 9650,2390 r90 top
R113 "22R 1%" RES_C_1005X40 9380,2390 r90 top
R114 "100k 1%" RES_C_1005X40 7345,2390 r90 top
R115 "100k 1%" RES_C_1005X40 7615,2390 r90 top
R116 "100k 1%" RES_C_1005X40 7885,2390 r90 top
R117 "100k 1%" RES_C_1005X40 8155,2390 r90 top
R118 "100k 1%" RES_C_1005X40 8425,2390 r90 top
R119 "100R 5%" RES_C_1005X40 7075,2390 r90 top
R120 "22R" RES_C_1005X40 9715,11970 r90 top
R121 "22R" RES_C_1005X40 8675,11970 r90 top
R122 "22R" RES_C_1005X40 7635,11970 r90 top
R123 "4.7k" RES_C_1005X40 7915,8560 r90 top
R124 "4.7k" RES_C_1005X40 8195,8560 r90 top
R125 "4.7k" RES_C_1005X40 7075,8560 r90 top
R126 "4.7k" RES_C_1005X40 7355,8560 r90 top
R127 "4.7k" RES_C_1005X40 7635,8560 r90 top
R128 "22R" RES_C_1005X40 8685,12935 r90 top
R129 "22R" RES_C_1005X40 8405,12935 r90 top
R130 "22R" RES_C_1005X40 7615,12935 r90 top
R131 "16.5k" RES_C_1005X40 7075,12935 r90 top
R132 "16.5k" RES_C_1005X40 7335,12935 r90 top
R133 "100R" RES_C_1005X40 9060,4360 r90 top
R134 "100R" RES_C_1005X40 7865,4360 r90 top
R135 "60R" RES_C_1005X40 8125,1470 r90 top
R136 "60R" RES_C_1005X40 7565,1470 r90 top
R137 "10k" RES_C_1005X40 7285,1470 r90 top
R138 "10k 1%" RES_C_1005X40 12325,1175 r90 top
R139 "100R 5%" RES_C_1005X40 11070,1175 r90 top
R140 "100R 5%" RES_C_1005X40 11350,1175 r90 top
R141 "10k 1%" RES_C_1005X40 10250,1175 r90 top
R142 "1k 1%" RES_C_1005X40 9970,1175 r90 top
R143 "1k 1%" RES_C_1005X40 9690,1175 r90 top
R144 "2.2k 1%" RES_C_1005X40 9180,1175 r90 top
R145 "100R 5%" RES_C_1005X40 8435,1175 r90 top
R146 "10k 1%" RES_C_1005X40 8155,1175 r90 top
R147 "10k" RES_C_1005X40 7955,8080 r90 top
R148 "10k" RES_C_1005X40 8235,8080 r90 top
R149 "120R" RES_C_1005X40 7075,8080 r90 top
R150 "120R" RES_C_1005X40 7675,7595 r90 top
R151 "1k" RES_C_1005X40 8270,6255 r90 top
R152 "100k 1%" RES_C_1005X40 7075,6255 r90 top
SB1 "JUMPER" JUMPER_1608 15940,5075 r90 top
SB2 "JUMPER" JUMPER_1608 8180,12810 r90 top
SW1 "Switch 3x1" SS12D10 9110,6340 r90 top value="Switch 4x2"
TP1 "" Testpoint_50 11615,5035 r90 top
TP2 "" Testpoint_50 11385,5035 r90 top
TP3 "" Testpoint_50 17050,4680 r90 top
TP4 "" Testpoint_50 9115,4680 r90 top
TP5 "" Testpoint_50 7985,4680 r90 top
TP6 "" Testpoint_50 7525,4680 r90 top
TP7 "" Testpoint_50 7060,4680 r90 top
U1 "TPS259470ARPWR" VQFN-HR-10 15320,5075 r0 top
U2 "TPS5430DDAR" CONV_TPS5430DDAR 12780,5130 r0 top
U3 "MCP2221 SOIC-14_TSSOP-14_PDIP-14" SOIC-14 18325,4860 r0 top value=MCP2221A
U4 "MCP16502 QFN-32" QFN-32_5X5_EP3.7X3.7 17410,4790 r0 top value=MCP16502TAB-E/S8B
U5 "Microchip PAC1934 UQFN-16" UQFN-16_4X4_EP2.6X2.6 13055,4770 r0 top value=PAC1934
U6 "SAMA7D65" TFBGA-343_14x14 9200,10125 r0 top value=SAMA7D65-V/4HB-SL3
U8 "MTFC32GAZAQDW-AAT" BGA_100_C_100P_10X17_1400X1800X150 16330,3575 r0 top
U9 "MTFC32GAZAQDW-AAT" BGA_100_C_100P_10X17_1400X1800X150 9535,3575 r0 top
U10 "MIC94085YFT-TR" IC_MIC94085YFT-TR 7855,10610 r90 top
U11 "AS3004204-0108X0PSAY" SOIC127P790X216-8N 8830,2880 r90 top
U12 "USBLC6-2SC6" SOT95P280X145-6N 8540,12345 r0 top
U13 "MCP170X SOT-23-3_SOT-23A-3" SOT-23-3 11845,2290 r0 top value=MCP1700/3.3V
U14 "TC1047AVNBTR" SOT-23_MC_MCH 10045,11895 r0 top
U15 "TC1047AVNBTR" SOT-23_MC_MCH 8985,11895 r0 top
U16 "TC1047AVNBTR" SOT-23_MC_MCH 7965,11895 r0 top
U17 "RV-3129-C3-32.768KHZ-OPTION-A-TB-QA" IC_RV-3129-C3-32.768KHZ-OPTION-A-TB-QA 8545,8470 r0 top
U18 "TPL5010DDCR" TPL5010DDCR 9045,12830 r0 top
U19 "DS90LV011AQ-Q1" DS90LV011AQ-Q1 9405,4255 r0 top
U20 "DS90LV011AQ-Q1" DS90LV011AQ-Q1 7695,4255 r0 top
U21 "SN65HVD230DR" SOIC127P599X175-8N 8550,1405 r0 top
U22 "MAX3485CSA+T" 21-0041-3-M_90-0096-8L_MXM 7750,8010 r0 top
U23 "MAX3488ESA+T" 21-0041-3-M_90-0096-8L_MXM 7470,7530 r0 top
U? "AS4C512M16D3LA-10BIN TFBGA-96" FBGA96_9X13P5_ALL 7337.01,609.25 r0 top value=AS4C512M16D3LA-10BIN
VR1 "LM1117MP-3.3/NOPB" VREG_LM1117MP-3.3/NOPB 9285,5160 r0 top
Y1 "Crystal 4 Pins" XTAL_ECS2401037B2JTNTR 8220,9395 r0 top value=24MHz
Y2 "Crystal 2 Pins" CRYSTAL_FC-12M_L2.05W1.2H0.6 8035,9400 r0 top value="32.768 kHz"

## Footprints (in the part's own frame and the unit in brackets; to place one, negate y for a bottom-side part, rotate by r counter-clockwise, add the part's x,y. Pads: shape width x height; smd on the part's side, far side on the other; paste and mask are expansions set on the pad)
21-0041-3-M_90-0096-8L_MXM [mil]
  rect 78x21.29 smd paste+0 mask+0: 1(-97.05,75) 2(-97.05,25) 3(-97.05,-25) 4(-97.05,-75) 5(97.05,-75) 6(97.05,-25) 7(97.05,25) 8(97.05,75)
  silkscreen extent -102,-103 84,112, body extent -122,-98 122,98, height 69
5040500691 [mil]
  rect 26x41 smd paste+0: 1(147.64,-119.76) 2(88.58,-119.76) 3(29.53,-119.76) 4(-29.53,-119.76) 5(-88.58,-119.76) 6(-147.64,-119.76)
  rect 51x73 smd: 7(-238.19,84.57) 7(238.19,84.57)
  silkscreen extent -256,-173 256,125, body extent -267,-128 267,126, height 79
5040500991 [mil]
  rect 26x41 smd: 1(236.22,-119.76) 2(177.17,-119.76) 3(118.11,-119.76) 4(59.06,-119.76) 5(0,-119.76) 6(-59.06,-119.76) 7(-118.11,-119.76) 8(-177.17,-119.76) 9(-236.22,-119.76)
  rect 51x73 smd: M1(326.97,84.57) M2(-326.97,84.57)
  silkscreen extent -344,-173 344,126, body extent -354,-129 357,124, height 79
BAT_1056 [mm]
  rect 3.6x2.6 smd: N(7.61,0) P(-8.18,0)
  round 1.3 hole 1.3 unplated: ""(-3.98,0)
  round 1 hole 1 unplated: ""(3.51,0)
  silkscreen extent -11.74,-7.75 11.18,7.75, body extent -6.36,-9.34 8.78,9.46, height 1.83
BGA_100_C_100P_10X17_1400X1800X150 [mm] "BGA, 100-Leads, Body 14.00x18.00mmx1.50mm, Pitch 1.00mm"
  round 0.49 smd: A1(-4.5,8) A2(-3.5,8) A9(3.5,8) A10(4.5,8) B1(-4.5,7) B10(4.5,7) D2(-3.5,5) D3(-2.5,5) D4(-1.5,5) D5(-0.5,5) D6(0.5,5) D7(1.5,5) D8(2.5,5) D9(3.5,5) E2(-3.5,4) E3(-2.5,4) E4(-1.5,4) E5(-0.5,4) E6(0.5,4) E7(1.5,4) E8(2.5,4) E9(3.5,4) F2(-3.5,3) F3(-2.5,3) F4(-1.5,3) F5(-0.5,3) F6(0.5,3) F7(1.5,3) F8(2.5,3) F9(3.5,3) G2(-3.5,2) G3(-2.5,2) G4(-1.5,2) G5(-0.5,2) G6(0.5,2) G7(1.5,2) G8(2.5,2) G9(3.5,2) H2(-3.5,1) H3(-2.5,1) H4(-1.5,1) H5(-0.5,1) H6(0.5,1) H7(1.5,1) H8(2.5,1) H9(3.5,1) J2(-3.5,0) J3(-2.5,0) J4(-1.5,0) J5(-0.5,0) J6(0.5,0) J7(1.5,0) J8(2.5,0) J9(3.5,0) K2(-3.5,-1) K3(-2.5,-1) K4(-1.5,-1) K5(-0.5,-1) K6(0.5,-1) K7(1.5,-1) K8(2.5,-1) K9(3.5,-1) L2(-3.5,-2) L3(-2.5,-2) L4(-1.5,-2) L5(-0.5,-2) L6(0.5,-2) L7(1.5,-2) L8(2.5,-2) L9(3.5,-2) M2(-3.5,-3) M3(-2.5,-3) M4(-1.5,-3) M5(-0.5,-3) M6(0.5,-3) M7(1.5,-3) M8(2.5,-3) M9(3.5,-3) N2(-3.5,-4) N3(-2.5,-4) N4(-1.5,-4) N5(-0.5,-4) N6(0.5,-4) N7(1.5,-4) N8(2.5,-4) N9(3.5,-4) P2(-3.5,-5) P3(-2.5,-5) P4(-1.5,-5) P5(-0.5,-5) P6(0.5,-5) P7(1.5,-5) P8(2.5,-5) P9(3.5,-5) T1(-4.5,-7) T10(4.5,-7) U1(-4.5,-8) U2(-3.5,-8) U9(3.5,-8) U10(4.5,-8)
  round 0.35 on Mech8 paste+0 mask+0: A1(-4.5,8) A2(-3.5,8) A9(3.5,8) A10(4.5,8) B1(-4.5,7) B10(4.5,7) D2(-3.5,5) D3(-2.5,5) D4(-1.5,5) D5(-0.5,5) D6(0.5,5) D7(1.5,5) D8(2.5,5) D9(3.5,5) E2(-3.5,4) E3(-2.5,4) E4(-1.5,4) E5(-0.5,4) E6(0.5,4) E7(1.5,4) E8(2.5,4) E9(3.5,4) F2(-3.5,3) F3(-2.5,3) F4(-1.5,3) F5(-0.5,3) F6(0.5,3) F7(1.5,3) F8(2.5,3) F9(3.5,3) G2(-3.5,2) G3(-2.5,2) G4(-1.5,2) G5(-0.5,2) G6(0.5,2) G7(1.5,2) G8(2.5,2) G9(3.5,2) H2(-3.5,1) H3(-2.5,1) H4(-1.5,1) H5(-0.5,1) H6(0.5,1) H7(1.5,1) H8(2.5,1) H9(3.5,1) J2(-3.5,0) J3(-2.5,0) J4(-1.5,0) J5(-0.5,0) J6(0.5,0) J7(1.5,0) J8(2.5,0) J9(3.5,0) K2(-3.5,-1) K3(-2.5,-1) K4(-1.5,-1) K5(-0.5,-1) K6(0.5,-1) K7(1.5,-1) K8(2.5,-1) K9(3.5,-1) L2(-3.5,-2) L3(-2.5,-2) L4(-1.5,-2) L5(-0.5,-2) L6(0.5,-2) L7(1.5,-2) L8(2.5,-2) L9(3.5,-2) M2(-3.5,-3) M3(-2.5,-3) M4(-1.5,-3) M5(-0.5,-3) M6(0.5,-3) M7(1.5,-3) M8(2.5,-3) M9(3.5,-3) N2(-3.5,-4) N3(-2.5,-4) N4(-1.5,-4) N5(-0.5,-4) N6(0.5,-4) N7(1.5,-4) N8(2.5,-4) N9(3.5,-4) P2(-3.5,-5) P3(-2.5,-5) P4(-1.5,-5) P5(-0.5,-5) P6(0.5,-5) P7(1.5,-5) P8(2.5,-5) P9(3.5,-5) T1(-4.5,-7) T10(4.5,-7) U1(-4.5,-8) U2(-3.5,-8) U9(3.5,-8) U10(4.5,-8)
  silkscreen extent -7.77,-9 7,9, body extent -7,-9 7,9, height 1.5
CAP_C_0603x30 [mm] "Chip Capacitor, 2-Leads, Body 0.6x0.3mm, IPC Medium Density"
  rrect50% 0.275x0.3 smd mask+0.064: 1(-0.262,0) 2(0.262,0)
  body extent -0.3,-0.15 0.3,0.15, height 0.28
CAP_C_1005X60 [mm]
  rrect50% 0.65x0.6 smd mask+0.05: 1(-0.5,0) 2(0.5,0)
  silkscreen extent -0.08,-0.3 0.08,0.3, body extent -0.5,-0.26 0.5,0.27, height 0.35
CON_SD_GSD090012SEU [mm]
  rect 1x1.5 smd mask+0.05: 1(6.875,13.3) 2(4.375,13.3) 3(1.875,13.3) 4(-0.625,13.3) 5(-3.125,13.3) 6(-5.625,13.3) 7(-8.05,13.3) 8(-9.75,13.3) 9(9.375,13.3)
  round 0 hole 1.1 unplated mask+0.05: 1.5mm(-11.5,10.5)
  round 0 hole 1.6 unplated mask+0.05: 1.5mm(9.5,10.5)
  rect 0.7x1.5 smd mask+0.05: 10(-11.05,13.3) 11(-12.25,13.3)
  rect 1.5x2.8 smd mask+0.05: 12(-13.65,-10) 12(-13.65,11.5) 12(11.45,11.5) 12(13.65,-10)
  Top Layer keep-out region: -10.5,0.05 10.5,0.05 10.5,5.35 -10.5,5.35
  silkscreen extent -14.7,-12.6 14.7,14.35, body extent -14.08,-12.5 14.02,13.75, height 3.3
CON_USB_Micro-AB_SMD_RA_MOLEX_0475890001 [mm] "Connector, Receptacle, Micro-USB Type AB, R/A, SMT"
  oval 1.225x1.9 hole 0.6 slot 1.3 at 90 deg: 0(-4.175,0.127) 0(4.175,0.127)
  oval 1.05x1.25 hole 0.65 slot 0.85 at 90 deg mask+0.05: 0(-2.225,3.125) 0(2.225,3.125)
  rect 1.8x1.9 smd: 0(-1.15,0.127) 0(1.15,0.127)
  rect 0.4x1.35 smd mask+0.05: 1(-1.3,2.8) 2(-0.65,2.8) 3(0,2.8) 4(0.65,2.8) 5(1.3,2.8)
  Top Layer region: -4.675,-0.823 -2.6,-0.823 -2.6,1.077 -4.675,1.077
  Top Layer region: 4.65,1.077 2.6,1.077 2.6,-0.823 4.65,-0.823
  silkscreen extent -3.85,-2.12 3.85,2.15, body extent -4.32,-2.57 4.33,3.33, height 2.76
CONV_TPS5430DDAR [mm] "IC REG BUCK ADJ 3A 8SOPWR"
  rrect10% 1.55x0.6 smd mask+0: 1(-2.7,1.905) 2(-2.7,0.635) 3(-2.7,-0.635) 4(-2.7,-1.905) 5(2.7,-1.905) 6(2.7,-0.635) 7(2.7,0.635) 8(2.7,1.905)
  round 0.3 hole 0.2 mask+0: 6(-0.65,-1.95) 6(-0.65,-0.65) 6(-0.65,0.65) 6(-0.65,1.95) 6(0.65,-1.95) 6(0.65,-0.65) 6(0.65,0.65) 6(0.65,1.95)
  rect 2.95x4.9 smd paste+0: 9(0,0)
  silkscreen extent -4.17,-2.69 1.96,2.72, body extent -3,-2.45 3,2.45, height 1.7
CRYSTAL_FC-12M_L2.05W1.2H0.6 [mm] "CRYSTAL 32.768KHZ 12.5PF SMD"
  rect 0.7x1.4 smd mask+0: 1(-0.75,0) 2(0.75,0)
  silkscreen extent -1.4,-1 1.4,1, body extent -1.02,-0.6 1.03,0.6, height 0.6
DC0 [mm] "Jac DC input"
  oval 2x4 hole 0.8 slot 3 at 90 deg: 1(2.9,0) 2(-2.9,0)
  oval 4x2 hole 0.8 slot 3 at 0 deg: 3(-0.1,-4.8)
  silkscreen extent -10.6,-4.8 3.9,4.5, body extent -10.6,-4.9 3.9,4.5, height 10.7
DO-214AC_SMA [mm] "Molded Diode, 2-Leads, Body 5.20x2.61mm, IPC Medium Density"
  rrect30% 2.55x1.65 smd: 1(-2.05,0) 2(2.05,0)
  silkscreen extent -3.6,-1.5 2.8,1.5, body extent -2.6,-1.3 2.6,1.3, height 2.4
DS90LV011AQ-Q1 [mm]
  rrect50% 1.21x0.59 smd: 1(-1.255,0.95) 2(-1.255,0) 3(-1.255,-0.95) 4(1.255,-0.95) 5(1.255,0.95)
  silkscreen extent -1.45,-1.45 0.8,1.88, body extent -1.4,-1.45 1.4,1.45, height 1.45
ESQ-126-14-G-D [mm]
  rect 1.53x1.53 / inner round 1.53 / far side rect 1.53x1.53 hole 0.9: 01(31.75,-1.27)
  round 1.53 hole 0.9: 02(31.75,1.27) 03(29.21,-1.27) 04(29.21,1.27) 05(26.67,-1.27) 06(26.67,1.27) 07(24.13,-1.27) 08(24.13,1.27) 09(21.59,-1.27) 10(21.59,1.27) 11(19.05,-1.27) 12(19.05,1.27) 13(16.51,-1.27) 14(16.51,1.27) 15(13.97,-1.27) 16(13.97,1.27) 17(11.43,-1.27) 18(11.43,1.27) 19(8.89,-1.27) 20(8.89,1.27) 21(6.35,-1.27) 22(6.35,1.27) 23(3.81,-1.27) 24(3.81,1.27) 25(1.27,-1.27) 26(1.27,1.27) 27(-1.27,-1.27) 28(-1.27,1.27) 29(-3.81,-1.27) 30(-3.81,1.27) 31(-6.35,-1.27) 32(-6.35,1.27) 33(-8.89,-1.27) 34(-8.89,1.27) 35(-11.43,-1.27) 36(-11.43,1.27) 37(-13.97,-1.27) 38(-13.97,1.27) 39(-16.51,-1.27) 40(-16.51,1.27) 41(-19.05,-1.27) 42(-19.05,1.27) 43(-21.59,-1.27) 44(-21.59,1.27) 45(-24.13,-1.27) 46(-24.13,1.27) 47(-26.67,-1.27) 48(-26.67,1.27) 49(-29.21,-1.27) 50(-29.21,1.27) 51(-31.75,-1.27) 52(-31.75,1.27)
  silkscreen extent -33.28,-2.47 34.02,2.47, body extent -33.27,-2.67 33.27,2.41, height 11.2
FBGA96_9X13P5_ALL [mil]
  round 22 smd paste+0 mask+0: A1(-125.98,236.22) A2(-94.49,236.22) A3(-62.99,236.22) A7(62.99,236.22) A8(94.49,236.22) A9(125.98,236.22) B1(-125.98,204.72) B2(-94.49,204.72) B3(-62.99,204.72) B7(62.99,204.72) B8(94.49,204.72) B9(125.98,204.72) C1(-125.98,173.23) C2(-94.49,173.23) C3(-62.99,173.23) C7(62.99,173.23) C8(94.49,173.23) C9(125.98,173.23) D1(-125.98,141.73) D2(-94.49,141.73) D3(-62.99,141.73) D7(62.99,141.73) D8(94.49,141.73) D9(125.98,141.73) E1(-125.98,110.24) E2(-94.49,110.24) E3(-62.99,110.24) E7(62.99,110.24) E8(94.49,110.24) E9(125.98,110.24) F1(-125.98,78.74) F2(-94.49,78.74) F3(-62.99,78.74) F7(62.99,78.74) F8(94.49,78.74) F9(125.98,78.74) G1(-125.98,47.24) G2(-94.49,47.24) G3(-62.99,47.24) G7(62.99,47.24) G8(94.49,47.24) G9(125.98,47.24) H1(-125.98,15.75) H2(-94.49,15.75) H3(-62.99,15.75) H7(62.99,15.75) H8(94.49,15.75) H9(125.98,15.75) J1(-125.98,-15.75) J2(-94.49,-15.75) J3(-62.99,-15.75) J7(62.99,-15.75) J8(94.49,-15.75) J9(125.98,-15.75) K1(-125.98,-47.24) K2(-94.49,-47.24) K3(-62.99,-47.24) K7(62.99,-47.24) K8(94.49,-47.24) K9(125.98,-47.24) L1(-125.98,-78.74) L2(-94.49,-78.74) L3(-62.99,-78.74) L7(62.99,-78.74) L8(94.49,-78.74) L9(125.98,-78.74) M1(-125.98,-110.24) M2(-94.49,-110.24) M3(-62.99,-110.24) M7(62.99,-110.24) M8(94.49,-110.24) M9(125.98,-110.24) N1(-125.98,-141.73) N2(-94.49,-141.73) N3(-62.99,-141.73) N7(62.99,-141.73) N8(94.49,-141.73) N9(125.98,-141.73) P1(-125.98,-173.23) P2(-94.49,-173.23) P3(-62.99,-173.23) P7(62.99,-173.23) P8(94.49,-173.23) P9(125.98,-173.23) R1(-125.98,-204.72) R2(-94.49,-204.72) R3(-62.99,-204.72) R7(62.99,-204.72) R8(94.49,-204.72) R9(125.98,-204.72) T1(-125.98,-236.22) T2(-94.49,-236.22) T3(-62.99,-236.22) T7(62.99,-236.22) T8(94.49,-236.22) T9(125.98,-236.22)
  Keep-Out Layer region: -159.23,-269.47 -159.23,269.47 159.23,269.47 159.23,-269.47
  silkscreen extent -215,-271 182,271, body extent -177,-266 177,266, height 47